# Altium PCB ESC.PcbDoc (part 1 of 2)
Units mil, origin at the board's own origin, x right, y up, seen from the top; angles counter-clockwise.
Board outline 1988.19 x 2913.39 mil, 2 copper layers (Top Layer, Bottom Layer); 78 components, 72 nets, 292 pads, 188 vias.
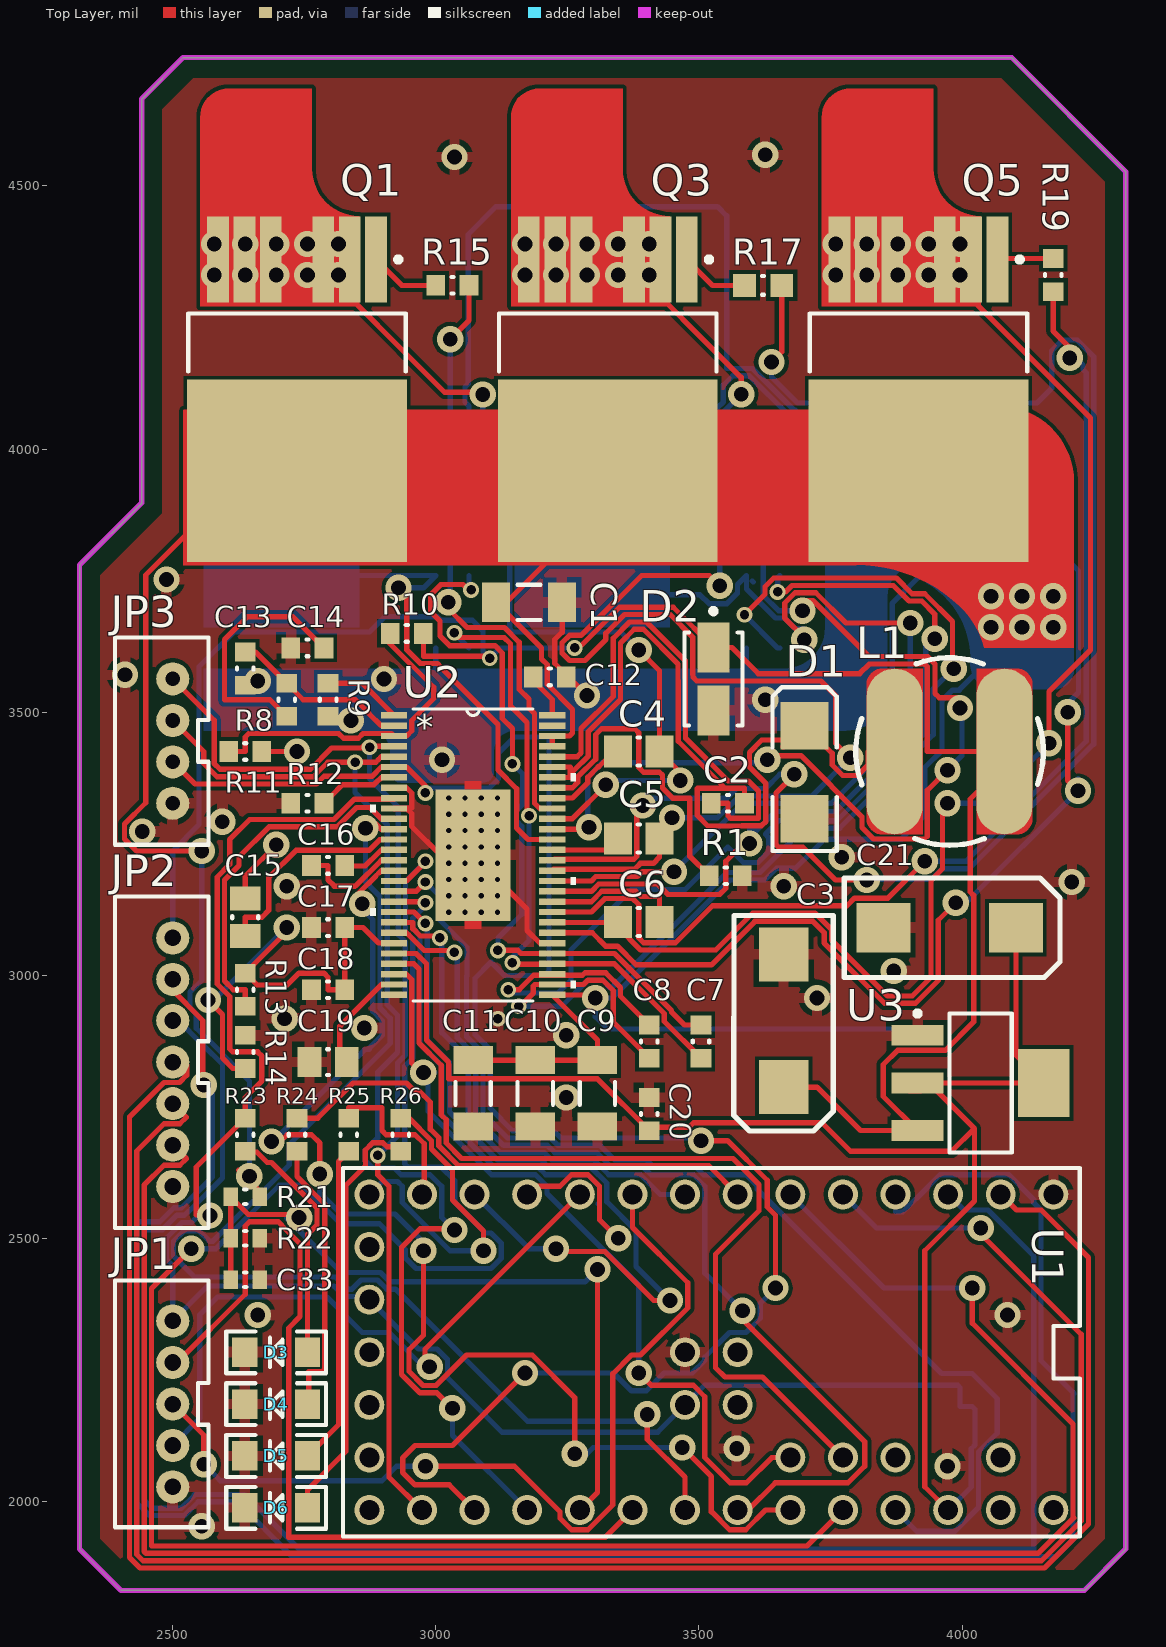
[diagram p0: Top Layer view]
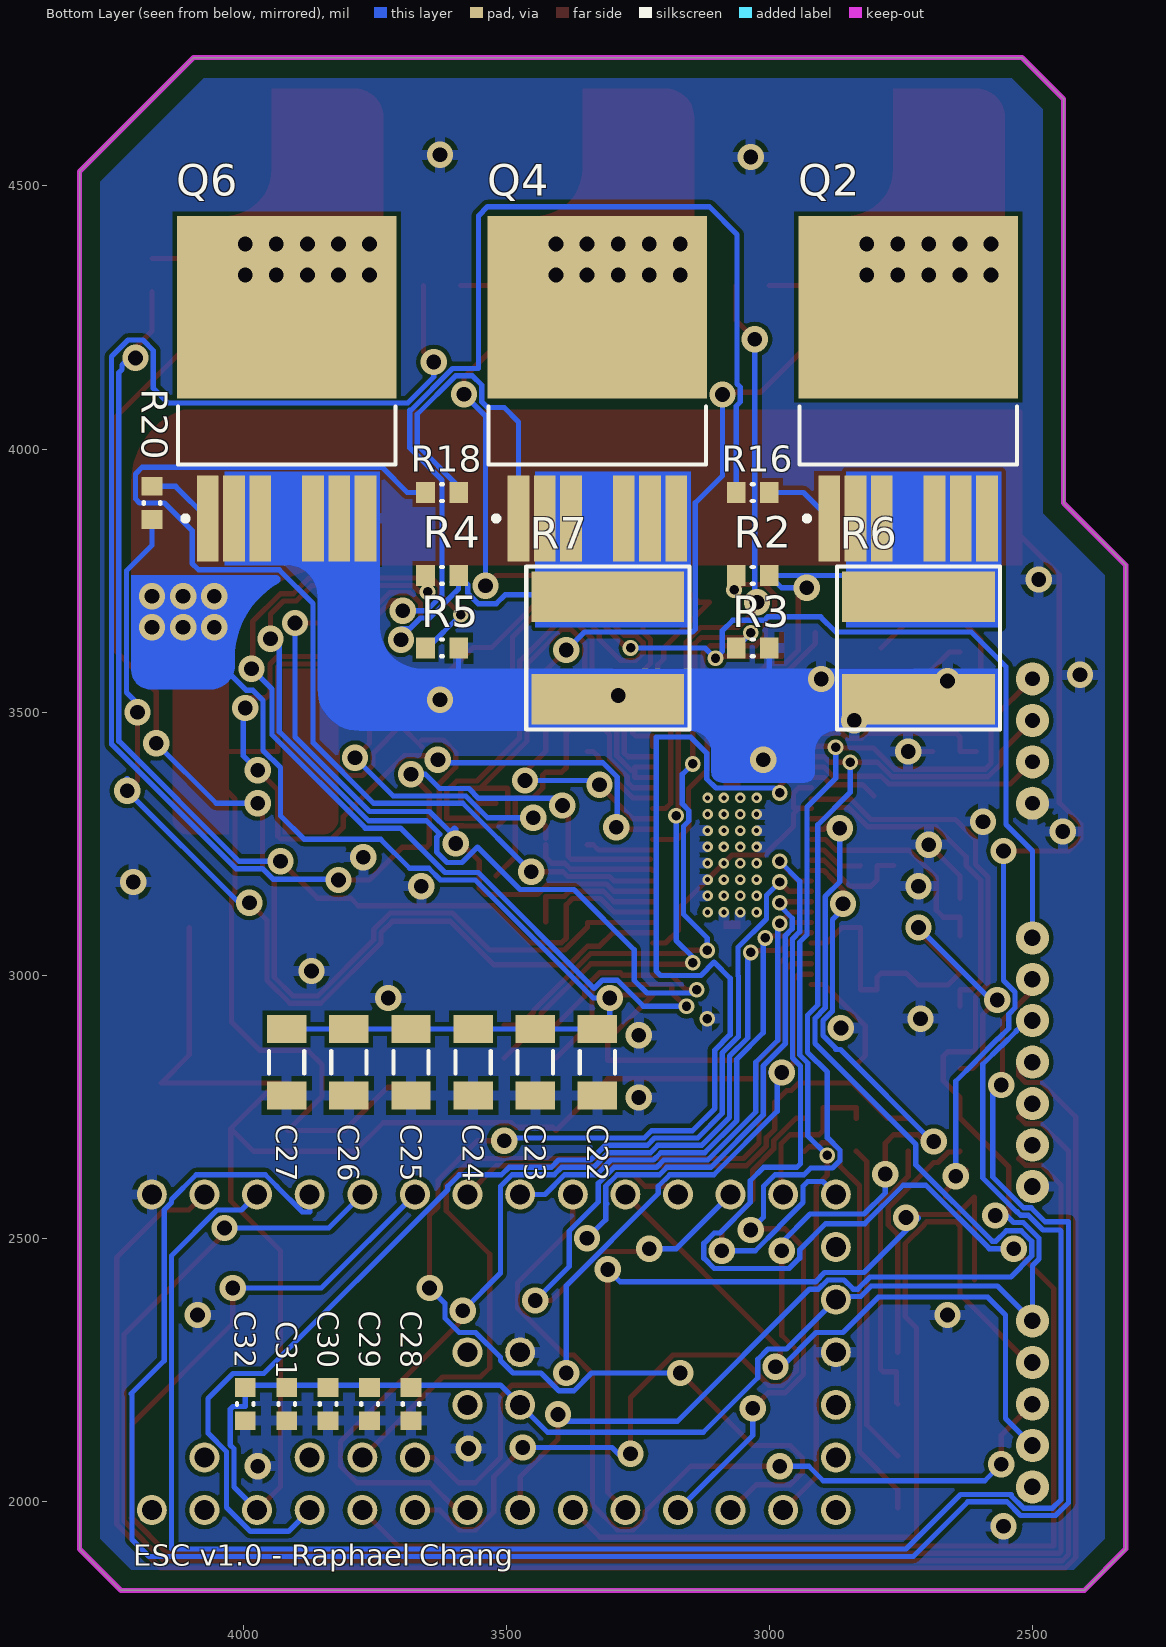
[diagram p1: Bottom Layer view, seen from below]

## Layer stack, top to bottom
Top Solder: solder mask 0.4, Solder Resist, Dk 3.5
Top Layer: signal copper 1.4
Dielectric 1: dielectric 12.6, FR-4, Dk 4.8
Bottom Layer: signal copper 1.4
Bottom Solder: solder mask 0.4, Solder Resist, Dk 3.5

## Board outline
2322.83,1909.45 2401.57,1830.71 4232.28,1830.71 4311.02,1909.45 4311.02,4527.56 4094.49,4744.09 2519.68,4744.09 2440.94,4665.35 2440.94,3897.64 2322.83,3779.53

## Design rules (kind name [scope] priority, off if disabled: settings)
Clearance Clearance_1 [InPolygon] p1: gap=7.87
Clearance [All] p2: gap=3.94
PlaneClearance [All] p1: clearance=40
PolygonConnect [All] p1: connectstyle=Relief reliefconductorwidth=20 reliefentries=4 polygonreliefangle="90 Angle" airgapwidth=10
RoutingVias [All] p1: holewidth=28 width=50 viastyle="Through Hole" minholewidth=18 minwidth=30 maxholewidth=28 maxwidth=50
SolderMaskExpansion [All] p1: expansion=4
Width [All] p1: maxlimit=10 minlimit=10 preferedwidth=10
29 further rules are at their usual default settings.

## Classes and differential pairs
component class U_Power: C1 C2 C3 C4 C5 C6 C7 C8 C9 C10 C11 C12 C13 C14 C15 C16 C17 C18 C19 C20 C21 C22 C23 C24 C25 C26 C27 D1 D2 L1 Q1 Q2 Q3 Q4 Q5 Q6 R1 R2 R3 R4 R5 R6 R7 R8 R9 R10 R11 R12 R13 R14 R15 R16 R17 R18 R19 R20 U2 U3
component class U_MCU: C28 C29 C30 C31 C32 C33 D3 D4 D5 D6 R21 R22 R23 R24 R25 R26 U1
component class ESC: JP1 JP2 JP3

## Components (designator, comment, footprint, x,y, rotation, side; value= is the part's Value field where it differs from the comment)
C1 "10uF" CAPC1206(3216)190_M 3177.17,3708.66 r0 top
C2 "100nF" CAPC0603(1608)100_N 3555.12,3326.77 r0 top
C3 "100uF" AVX-CAPC7343_V 3661.42,2913.39 r90 top
C4 "220nF" CAPC0805(2012)145_M 3385.83,3425.2 r0 top
C5 "220nF" CAPC0805(2012)145_M 3385.83,3259.84 r0 top
C6 "220nF" CAPC0805(2012)145_M 3385.83,3101.22 r180 top
C7 "2.2nF" CAPC0603(1608)100_N 3503.94,2874.02 r270 top
C8 "2.2nF" CAPC0603(1608)100_N 3405.51,2874.02 r270 top
C9 "10uF" CAPC1206(3216)190_M 3307.09,2775.59 r90 top
C10 "10uF" CAPC1206(3216)190_M 3188.98,2775.59 r90 top
C11 "10uF" CAPC1206(3216)190_M 3070.87,2775.59 r90 top
C12 "22nF" CAPC0603(1608)100_N 3216.54,3566.93 r0 top
C13 "120pF" CAPC0603(1608)100_N 2637.8,3582.68 r90 top
C14 "6.8nF" CAPC0603(1608)100_N 2755.91,3622.05 r0 top
C15 "2.2uF" CAPC0805(2012)145_N 2637.8,3110.24 r90 top
C16 "22nF" CAPC0603(1608)100_N 2795.28,3208.66 r0 top
C17 "2.2uF" CAPC0603(1608)55_N 2795.28,3090.55 r0 top
C18 "2.2uF" CAPC0603(1608)55_N 2795.28,2972.44 r0 top
C19 "2.2uF" CAPC0805(2012)145_N 2795.28,2834.65 r0 top
C20 "2.2uF" CAPC0603(1608)55_N 3405.51,2736.22 r90 top
C21 "100uF" AVX-CAPC7343_V 3976.38,3090.55 r180 top
C22 "10uF" CAPC1206(3216)190_M 3326.77,2834.65 r90 bottom
C23 "10uF" CAPC1206(3216)190_M 3444.88,2834.65 r90 bottom
C24 "10uF" CAPC1206(3216)190_M 3562.99,2834.65 r90 bottom
C25 "10uF" CAPC1206(3216)190_M 3681.1,2834.65 r90 bottom
C26 "10uF" CAPC1206(3216)190_M 3799.21,2834.65 r90 bottom
C27 "10uF" CAPC1206(3216)190_M 3917.32,2834.65 r90 bottom
C28 "2.2uF" CAPC0603(1608)55_N 3681.1,2185.04 r90 bottom
C29 "2.2uF" CAPC0603(1608)55_N 3759.84,2185.04 r90 bottom
C30 "2.2uF" CAPC0603(1608)55_N 3838.58,2185.04 r90 bottom
C31 "2.2uF" CAPC0603(1608)55_N 3917.32,2185.04 r90 bottom
C32 "2.2uF" CAPC0603(1608)55_N 3996.06,2185.04 r90 bottom
C33 "100nF" CAPC0603(1608)100_L 2637.8,2421.26 r0 top
D1 "D Schottky" SMB 3700.79,3385.83 r90 top
D2 "TVS 5V" VISH-DO-214AC-2_N 3527.56,3562.99 r270 top
D3 "LED-BLUE" LED-1206 2696.85,2283.46 r180 top
D4 "LED-GREEN" LED-1206 2696.85,2185.04 r180 top
D5 "LED-RED" LED-1206 2696.85,2086.61 r180 top
D6 "LED-AMBER" LED-1206 2696.85,1988.19 r180 top
JP1 "Control Pins" JST-5-PTH-VERT 2500,2185.04 r90 top
JP2 "Encoder Pins" JST-7-PTH-VERT 2500,2834.65 r90 top
JP3 "Test Pins" JST-4-PTH-VERT 2500,3444.88 r90 top
L1 "SDR0805-180ML" SDR0805-180ML 3976.38,3425.2 r0 top
Q1 "IRFS7530" DPAK127P1525X483-7N 2736.22,4114.17 r270 top
Q2 "IRFS7530" DPAK127P1525X483-7N 2736.22,4114.17 r90 bottom
Q3 "IRFS7530" DPAK127P1525X483-7N 3326.77,4114.17 r270 top
Q4 "IRFS7530" DPAK127P1525X483-7N 3326.77,4114.17 r90 bottom
Q5 "IRFS7530" DPAK127P1525X483-7N 3917.32,4114.17 r270 top
Q6 "IRFS7530" DPAK127P1525X483-7N 3917.32,4114.17 r90 bottom
R1 "1M" RESC0603(1608)_N 3551.18,3188.98 r0 top
R2 "100R" RESC0603(1608)_N 3031.5,3759.84 r180 bottom
R3 "100R" RESC0603(1608)_N 3031.5,3622.05 r180 bottom
R4 "100R" RESC0603(1608)_N 3622.05,3759.84 r180 bottom
R5 "100R" RESC0603(1608)_N 3622.05,3622.05 r180 bottom
R6 "0.001R" Shunt 2716.54,3622.05 r90 bottom
R7 "0.001R" Shunt 3307.09,3622.05 r90 bottom
R8 "15K" RESC0603(1608)_N 2716.54,3523.62 r90 top
R9 "220K" RESC0603(1608)_N 2795.28,3523.62 r90 top
R10 "18K" RESC0603(1608)_N 2944.88,3649.61 r180 top
R11 "3K3" RESC0603(1608)_N 2637.8,3425.2 r0 top
R12 "10K" RESC0603(1608)_N 2755.91,3326.77 r0 top
R13 "330K" RESC0603(1608)_N 2637.8,2972.44 r90 top
R14 "10K" RESC0603(1608)_N 2637.8,2854.33 r90 top
R15 "4R7" RESC0603(1608)_N 3031.5,4311.02 r0 top
R16 "4R7" RESC0603(1608)_N 3031.5,3917.32 r0 bottom
R17 "4R7" RESC0603(1608)_M 3622.05,4311.02 r0 top
R18 "4R7" RESC0603(1608)_N 3622.05,3917.32 r0 bottom
R19 "4R7" RESC0603(1608)_N 4173.23,4330.71 r270 top
R20 "4R7" RESC0603(1608)_N 4173.23,3897.64 r270 bottom
R21 "200K" RESC0603(1608)_L 2637.8,2578.74 r0 top
R22 "10K" RESC0603(1608)_L 2637.8,2500 r0 top
R23 "10R" RESC0603(1608)_N 2637.8,2696.85 r90 top
R24 "15R" RESC0603(1608)_N 2736.22,2696.85 r90 top
R25 "180R" RESC0603(1608)_N 2834.65,2696.85 r90 top
R26 "150R" RESC0603(1608)_N 2933.07,2696.85 r90 top
U1 "Teensy 3.0" TEENSY_3.0_ALLANALOG 3523.62,2283.46 r270 top
U2 "DRV8302" DCA56_6P35X3P61 3070.87,3228.35 r0 top
U3 "TC2117" SOT-223-DB3_M 4035.43,2795.28 r0 top

## Footprints (in the part's own frame and the unit in brackets; to place one, negate y for a bottom-side part, rotate by r counter-clockwise, add the part's x,y. Pads: shape width x height; smd on the part's side, far side on the other; paste and mask are expansions set on the pad)
AVX-CAPC7343_V [mm] "SMT Capacitor, 2 Leads, Body 7.3x4.3mm"
  rect 2.6x2.4 smd: 1(-3.202,0.007) 2(3.198,0.007)
  silkscreen extent -5.33,-2.39 5.08,2.41, body extent -3.49,-2.03 3.51,2.04, height 4.05
CAPC0603(1608)55_N [mm] "Chip Capacitor, Body 1.6x0.8mm, Height 0.55mm, IPC Medium Density"
  rect 0.9x1 smd: 1(-0.8,0) 2(0.8,0)
  silkscreen extent -0.05,-0.4 0.05,0.4, body extent -0.87,-0.48 0.88,0.47, height 0.55
CAPC0603(1608)100_L [mm] "Chip Capacitor, Body 1.6x0.8mm, Height 1.0mm, IPC High Density"
  rect 0.7x0.9 smd: 1(-0.7,0) 2(0.7,0)
  silkscreen extent -0.05,-0.35 0.05,0.35, body extent -0.87,-0.47 0.88,0.48, height 1
CAPC0603(1608)100_N [mm] "Chip Capacitor, Body 1.6x0.8mm, Height 1.0mm, IPC Medium Density"
  rect 0.9x1 smd: 1(-0.8,0) 2(0.8,0)
  silkscreen extent -0.05,-0.4 0.05,0.4, body extent -0.87,-0.48 0.88,0.47, height 1
CAPC0805(2012)145_M [mm] "Chip Capacitor, Body 2.0x1.2mm, Height 1.45mm, IPC Low Density"
  rect 1.35x1.55 smd: 1(-1,0) 2(1,0)
  silkscreen extent -0.05,-0.68 0.05,0.68, body extent -1.1,-0.72 1.1,0.72, height 1.45
CAPC0805(2012)145_N [mm] "Chip Capacitor, Body 2.0x1.2mm, Height 1.45mm, IPC Medium Density"
  rect 1.15x1.45 smd: 1(-0.9,0) 2(0.9,0)
  silkscreen extent -0.05,-0.62 0.05,0.63, body extent -1.1,-0.72 1.1,0.73, height 1.45
CAPC1206(3216)190_M [mm] "Chip Capacitor, Body 3.2x1.6mm, Height 1.9mm, IPC Low Density"
  rect 1.35x1.9 smd: 1(-1.6,0) 2(1.6,0)
  silkscreen extent -0.55,-0.85 0.55,0.85, body extent -1.7,-0.9 1.7,0.9, height 1.9
DCA56_6P35X3P61 [mil]
  rect 50x12 smd mask+2: 1(-150.5,265.75) 2(-150.5,246.06) 3(-150.5,226.38) 4(-150.5,206.69) 5(-150.5,187.01) 6(-150.5,167.32) 7(-150.5,147.64) 8(-150.5,127.95) 9(-150.5,108.27) 10(-150.5,88.58) 11(-150.5,68.9) 12(-150.5,49.21) 13(-150.5,29.53) 14(-150.5,9.84) 15(-150.5,-9.84) 16(-150.5,-29.53) 17(-150.5,-49.21) 18(-150.5,-68.9) 19(-150.5,-88.58) 20(-150.5,-108.27) 21(-150.5,-127.95) 22(-150.5,-147.64) 23(-150.5,-167.32) 24(-150.5,-187.01) 25(-150.5,-206.69) 26(-150.5,-226.38) 27(-150.5,-246.06) 28(-150.5,-265.75) 29(150.5,-265.75) 30(150.5,-246.06) 31(150.5,-226.38) 32(150.5,-206.69) 33(150.5,-187.01) 34(150.5,-167.32) 35(150.5,-147.64) 36(150.5,-127.95) 37(150.5,-108.27) 38(150.5,-88.58) 39(150.5,-68.9) 40(150.5,-49.21) 41(150.5,-29.53) 42(150.5,-9.84) 43(150.5,9.84) 44(150.5,29.53) 45(150.5,49.21) 46(150.5,68.9) 47(150.5,88.58) 48(150.5,108.27) 49(150.5,127.95) 50(150.5,147.64) 51(150.5,167.32) 52(150.5,187.01) 53(150.5,206.69) 54(150.5,226.38) 55(150.5,246.06) 56(150.5,265.75)
  rect 142.13x250 smd mask-124.5: 57(0,0)
  Top Layer region: 15.75,125 -15.75,125 -15.75,125 -15.75,125 -15.75,139.96 15.75,139.96 15.75,125 15.75,125
  Top Layer region: 15.75,-125 -15.75,-125 -15.75,-125 -15.75,-125 -15.75,-139.96 15.75,-139.96 15.75,-125 15.75,-125
  silkscreen extent -196,-278 196,278
DPAK127P1525X483-7N [mm] "D2-PAK, 7-Pads, Body 7.93x8.63mm (max), IPC Medium Density"
  rect 4.15x1.05 smd mask+0.051: 1(-6.25,3.81) 2(-6.25,2.54) 2(-6.25,-1.27) 2(-6.25,1.27) 2(-6.25,-3.81) 2(-6.25,-2.54)
  rect 8.8x10.6 smd: 8(3.95,0)
  silkscreen extent -6.37,-5.25 -0.85,5.25, body extent -3.65,-5.28 6,5.28, height 4.83
JST-4-PTH-VERT [mil]
  round 63 hole 28: 1(-118.11,0) 2(-39.37,0) 3(39.37,0) 4(118.37,0)
  silkscreen extent -197,-68 197,110
JST-5-PTH-VERT [mil]
  round 63 hole 31.5: 1(-157.48,0) 2(-78.74,0) 3(0,0) 4(79,0) 5(158,0)
  silkscreen extent -234,-68 235,110
JST-7-PTH-VERT [mil]
  round 63 hole 31.5: 1(-236.22,0) 2(-157.48,0) 3(-78.74,0) 4(0.26,0) 5(79.26,0) 6(157.48,0) 7(236.22,0)
  silkscreen extent -315,-68 315,110
LED-1206 [mil]
  rect 48x56 smd: A(-59.06,0) C(60,0)
  silkscreen extent -94,-39 95,40
RESC0603(1608)_L [mm] "Chip Resistor, Body 1.6x0.8mm, IPC High Density"
  rect 0.7x0.9 smd: 1(-0.7,0) 2(0.7,0)
  silkscreen extent -0.05,-0.35 0.05,0.35, body extent -0.85,-0.47 0.85,0.47, height 0.6
RESC0603(1608)_M [mm] "Chip Resistor, Body 1.6x0.8mm, IPC Low Density"
  rect 1.1x1.1 smd: 1(-0.9,0) 2(0.9,0)
  silkscreen extent -0.05,-0.45 0.05,0.45, body extent -0.85,-0.47 0.85,0.47, height 0.6
RESC0603(1608)_N [mm] "Chip Resistor, Body 1.6x0.8mm, IPC Medium Density"
  rect 0.9x1 smd: 1(-0.8,0) 2(0.8,0)
  silkscreen extent -0.05,-0.4 0.05,0.4, body extent -0.85,-0.47 0.85,0.47, height 0.6
SDR0805-180ML [mm]
  rrect100% 2.7x8 smd: 1(-2.65,0) 2(2.65,0)
  Top Layer region: 3.25,4 1.3,4 1.3,-4 3.25,-4 3.537,-3.943 3.78,-3.78 3.943,-3.537 4,-3.25 4,-3.25 4,3.25 3.943,3.537 3.78,3.78 3.537,3.943 3.25,4
  Top Layer region: -3.25,4 -1.3,4 -1.3,-4 -3.25,-4 -3.537,-3.943 -3.78,-3.78 -3.943,-3.537 -4,-3.25 -4,-3.25 -4,3.25 -3.943,3.537 -3.78,3.78 -3.537,3.943 -3.25,4
  silkscreen extent -4.52,-4.53 4.52,4.52
Shunt [mm]
  rect 2.44x7.38 smd: 1(-2.48,0) 2(2.48,0)
  silkscreen extent -3.94,-3.94 3.94,3.94
SMB [mm] "DO-214-AA/SMB; 2 C-Bend Leads; Body 5.3 x 3.6 mm, inc. leads (LxW)"
  rect 2.3x2.3 smd: 1(-2.25,0) 2(2.25,0)
  silkscreen extent -3.8,-1.55 4.1,1.55
SOT-223-DB3_M [mm] "SOT223, 4-Leads, Body 6.5x3.5mm, Pitch 2.3mm, Lead Span 7mm, IPC Low Density"
  rect 2.5x1 smd: 1(-3.05,2.3) 2(-3.05,0) 3(-3.05,-2.3)
  rect 2.5x3.3 smd: 2(3.05,0)
  silkscreen extent -3.17,-3.35 1.5,3.47, body extent -1.85,-3.35 1.85,3.35, height 1.8
TEENSY_3.0_ALLANALOG [mil]
  round 57 hole 38: 0(-300,550) 1(-300,450) 2(-300,350) 3(-300,250) 3.3V(-100,-650) 3.3V(100,-50) 3.3V(300,450) 4(-300,150) 5(-300,50) 6(-300,-50) 7(-300,-150) 8(-300,-250) 9(-300,-350) 10(-300,-450) 11(-300,-550) 12(-300,-650) 13(300,-650) 14/A0(300,-550) 15/A1(300,-450) 16/A2(300,-350) 17/A3(300,-250) 18/A4(300,-150) 19/A5(300,-50) 20/A6(300,50) 21/A7(300,150) 22/A8(300,250) 23/A9(300,350) A10(200,250) A11(200,150) A12(0,50) A13(100,50) AGND(300,550) AREF(200,350) GND(-300,650) GND(0,-50) GND(0,-650) PGM(100,-650) RST(200,-650) VBAT(-200,-650) VIN(300,650) VUSB(200,550)
  silkscreen extent -350,-700 350,700
VISH-DO-214AC-2_N [mm] "DO-214AC, 2-Leads, Body 4.5x2.79mm, IPC Medium Density"
  rect 2.4x1.55 smd: 1(-1.525,0) 2(1.525,0)
  silkscreen extent -3.4,-1.4 2.25,1.4, body extent -2.25,-1.4 2.25,1.39, height 2.29

## Part data
C1 C9 C10 C11 C22 C23 C24 C25 C26 C27: library part CMP-1037-04982-1, "CAP 10uF 50V ±10% 1206 (3216 Metric) Thickness 1.9mm SMD"
C2 C33: library part CMP-1035-02591-1, "CAP 100nF 50V ±5% 0603 (1608 Metric) Thickness 1mm SMD"
C3 C21: library part CMP-0279-00002-1, "Capacitor, Tantalum, 220uF 10% 10V MCCT-D (7343-31)"
C4 C5 C6: library part CMP-1036-04540-1, "CAP 220nF 25V ±5% 0805 (2012 Metric) Thickness 1.45mm SMD"
C7 C8: library part CMP-1035-02036-1, "CAP 2.2nF 50V ±1% 0603 (1608 Metric) Thickness 1mm SMD"
C12 C16: library part CMP-1035-02425-1, "CAP 22nF 50V ±5% 0603 (1608 Metric) Thickness 1mm SMD"
C13: library part CMP-1035-01317-1, "CAP 120pF 50V ±1% 0603 (1608 Metric) Thickness 1mm SMD"
C14: library part CMP-1035-02266-1, "CAP 6.8nF 50V ±1% 0603 (1608 Metric) Thickness 1mm SMD"
C15 C19: library part CMP-1036-04830-1, "CAP 2.2uF 16V ±5% 0805 (2012 Metric) Thickness 1.45mm SMD"
C17 C18 C20 C28 C29 C30 C31 C32: library part CMP-1035-02762-1, "CAP 2.2uF 16V ±10% 0603 (1608 Metric) Thickness 0.55mm SMD"
D1: "Schottky Diode"
D2: library part CMP-0548-00235-1, "Transient Voltage Suppressor, 6.40 to 231 V, 5 V Stand-off Voltage, Uni-Directional, -55 to 155 degC, 2-pin DO-214AC, Pb-Free, Tape and Reel"
D3: library part LED-BLUE1206
D4: library part LED-GREEN1206
D5: library part LED-RED1206
D6: library part LED-AMBER1206
JP1: library part JST_5_VERT
JP2: library part JST_7_VERT
JP3: library part JST_4_VERT
L1: "Inductor"
Q1 Q2 Q3 Q4 Q5 Q6: "N-Channel MOSFET"
R1: library part CMP-1012-00146-1, "1M 0.1W 5% 0603 (1608 Metric)  SMD"
R2 R3 R4 R5: library part CMP-1012-00050-1, "100R 0.1W 5% 0603 (1608 Metric)  SMD"
R6 R7: library part Shunt, "Resistor"
R8: library part CMP-1012-00102-1, "15K 0.1W 5% 0603 (1608 Metric)  SMD"
R9: library part CMP-1012-00130-1, "220K 0.1W 5% 0603 (1608 Metric)  SMD"
R10: library part CMP-1012-00104-1, "18K 0.1W 5% 0603 (1608 Metric)  SMD"
R11: library part CMP-1012-00086-1, "3K3 0.1W 5% 0603 (1608 Metric)  SMD"
R12 R14 R22: library part CMP-1012-00098-1, "10K 0.1W 5% 0603 (1608 Metric)  SMD"
R13: library part CMP-1012-00134-1, "330K 0.1W 5% 0603 (1608 Metric)  SMD"
R15 R16 R17 R18 R19 R20: library part CMP-1012-00018-1, "4R7 0.1W 5% 0603 (1608 Metric)  SMD"
R21: library part CMP-1012-00129-1, "200K 0.1W 5% 0603 (1608 Metric)  SMD"
R23: library part CMP-1012-00026-1, "10R 0.1W 5% 0603 (1608 Metric)  SMD"
R24: library part CMP-1012-00030-1, "15R 0.1W 5% 0603 (1608 Metric)  SMD"
R25: library part CMP-1012-00056-1, "180R 0.1W 5% 0603 (1608 Metric)  SMD"
R26: library part CMP-1012-00054-1, "150R 0.1W 5% 0603 (1608 Metric)  SMD"
U1: library part TEENSY_3.0_ALLANALOGPINS
U2: library part DRV8302_DCA_56, "Imported"
U3: library part PM-LINEREG-TC2117-IL4

## Via types
v1: diameter 50, hole 28, Top Layer to Bottom Layer, 133 vias
v2: diameter 20, hole 10, Top Layer to Bottom Layer, 32 vias
v3: diameter 30, hole 18, Top Layer to Bottom Layer, 23 vias

## Nets (pads, with @x,y where several pads share a name; then routed paths per layer and width w, separated by ;. In a path a pad name is that pad's centre, name@x,y a point inside that pad or via, vN(x,y) a via of type N, cw(c..) or ccw(c..) an arc to the next point about the centre after c; other vN are vias at no path point)
5V: C3.1 D2.1 JP2.7 L1.2 R10.1 U3.3 | length 3785.9
  Top Layer w10: R10.1@2976.38,3649.61 2976.38,3630.08 2976.38,3606.3 3094.49,3606.3 3098.43,3602.36 v3(3102.36,3602.36) ; v3(3263.77,3622.04) 3271.66,3622.04 3348.91,3699.29 3451.3,3699.29 D2.1@3527.56,3623.03 3562.99,3623.03 3612.85,3573.18 3805.46,3573.18 3823.9,3591.61 3928.9,3591.61 3934.13,3586.38 3934.13,3425.2 L1.2@4080.71,3425.2 4080.71,3399.61 4015.75,3334.65 4015.75,3158.23 4022.13,3151.85 4022.13,2911.06 3968.27,2857.2 3877.18,2857.2 3850.39,2830.42 3850.39,2769.68 U3.3@3915.35,2704.72 3807.09,2704.72 3724.49,2787.32 C3.1@3661.14,2787.32
  Bottom Layer w10: JP2.7@2500,3070.87 2500,3236.22 2550.12,3286.34 2550.12,3586.38 2616.22,3652.48 2873.84,3652.48 2902.46,3681.1 3003.17,3681.1 3009.56,3674.72 3069.38,3674.72 3089.65,3654.45 3089.65,3615.07 v3(3102.36,3602.36) 3122.04,3622.04 v3(3263.77,3622.04)
CLK: JP2.5 U1.1 | length 3567.2
  Bottom Layer w10: JP2.5@2500,2913.91 2511.29,2913.91 2530.86,2894.34 2530.86,2893.55 2558.91,2865.51 2559.69,2865.51 2594.49,2830.71 2594.49,2614.92 2530.11,2550.55 2529.02,2550.55 2522.52,2544.05 2508.17,2544.05 2479.87,2515.75 2447.75,2515.75 2445.63,2513.62 2445.63,2003.19 2461.7,1987.12 2516.75,1987.12 2540.44,2010.81 2540.44,2013.2 2636.4,2013.2 2740.16,1909.45 4136.19,1909.45 4136.19,2466.93 4049.49,2553.62 4003.46,2553.62 U1.1@3973.62,2583.46
CS: JP2.6 U1.2 | length 4021.6
  Top Layer w10: JP2.6@2500,2992.13 2513.4,2978.72 2509.37,2974.69 2496.41,2974.69 2556.92,2914.17 2556.92,2793.46 v1(2559.05,2791.33)
  Bottom Layer w10: v1(2559.05,2791.33) 2575.35,2775.03 2575.35,2616.59 2516.75,2557.99 2502.4,2557.99 2475.91,2531.5 2431.69,2531.5 2431.69,1997.42 2455.92,1973.19 2522.52,1973.19 2548.6,1999.26 2622.78,1999.26 2726.54,1895.51 4179,1895.51 4211.06,1927.57 4211.06,2203.18 4212.6,2204.72 4150.12,2267.2 4150.12,2554.02 4136.19,2567.96 4136.19,2573.84 4089.13,2620.9 3958.12,2620.9 3936.18,2598.97 3936.18,2598.65 3887.5,2549.96 3873.62,2549.96 U1.2@3873.62,2583.46
DIO: JP2.4 U1.0 | length 3615.9
  Top Layer w10: JP2.4@2500,2834.91 2520.47,2834.91 2526.5,2828.87 2526.5,2809.79 2513.06,2796.34 2483.25,2796.34 2417.75,2730.84 2417.75,1893.22 2437.59,1873.39 4156.9,1873.39 4240.47,1956.96 4240.47,2463.67 4150.52,2553.62 4103.46,2553.62 U1.0@4073.62,2583.46
FAULT: JP3.2 U1.15/A1 U2.6 | length 3598.5
  Top Layer w10: JP3.2@2500,3405.51 2542.13,3363.39 2772.88,3363.39 2787.71,3378.21 2826.54,3378.21 2826.8,3377.95 2878.67,3377.95 2896.39,3395.67 2944.32,3395.67 2980.32,3359.67 v3(2980.31,3346.45) ; U1.15/A1@3073.62,1983.46 3025.59,2031.5 2960.63,2031.5 2937.01,2055.12 2937.01,2082.68 2960.63,2106.3 3031.5,2106.3 v1(3169.29,2244.09) ; v1(3503.94,2685.67) 3554.49,2685.67 3629.92,2610.24 3629.92,2559.68 3645.67,2543.94 v1(3645.67,2405.51)
  Bottom Layer w10: v3(2980.31,3346.45) 2980.31,3345.51 2990.58,3355.78 3101.53,3355.78 3119.17,3373.43 3119.17,3422.32 3149.61,3452.76 3215.2,3452.76 3215.2,3007.87 3207,2999.68 3130.24,2999.68 3105.1,3024.82 3074.49,2994.22 3074.49,2887.02 3103.62,2857.88 3103.62,2746.77 3145.87,2704.52 3223.77,2704.52 3237.7,2690.59 3499.02,2690.59 v1(3503.94,2685.67) ; v1(3169.29,2244.09) 3337.83,2244.09 3371.77,2210.16 3399.88,2210.16 3433.82,2244.09 3487.2,2244.09 3511.06,2267.96 3511.06,2273.84 3558.12,2320.9 3589.37,2320.9 3616.61,2348.14 3616.61,2376.45 v1(3645.67,2405.51)
GH_A: R15.2 U2.47 | length 1148.9
  Top Layer w10: v1(3023.62,3708.65) 3023.62,3696.47 3059.39,3660.7 3130.62,3660.7 3158.38,3632.93 3158.38,3543.54 3177.17,3524.76 3177.17,3507.87 3187.43,3497.61 3187.43,3464.71 3187.56,3464.58 ; v1(3027.56,4208.66) 3062.99,4244.09 R15.2@3062.99,4311.02 ; 3187.56,3444.87 3187.43,3444.74 3187.43,3425.34 3187.57,3425.2 3187.43,3425.06 3187.43,3405.65 3187.57,3405.51 3187.43,3405.37 3187.43,3385.97 3187.57,3385.83 3187.43,3385.69 3187.43,3366.28 3187.57,3366.14 3187.43,3366 3187.43,3346.6 3187.57,3346.46 3187.43,3346.32 3187.43,3326.91 3197.41,3316.93 U2.47@3221.37,3316.93 ; 3187.56,3444.89 3187.43,3445.02 3187.43,3464.43 3187.56,3464.55
  Bottom Layer w10: v1(3023.62,3708.65) 3027.56,3712.6 v1(3027.56,4208.66)
GH_B: R17.2 U2.42 | length 3132.1
  Top Layer w10: U2.42@3226.11,3220.39 3376.73,3220.39 3381.97,3225.63 3381.97,3311.1 3393.69,3322.82 v1(3393.33,3322.46) ; v1@3625.98,4153.54 3657.48,4185.04 R17.2@3657.48,4311.02 ; v1(3681.1,3381.89) 3681.1,3380.75 3646.58,3346.22 3646.58,3248.27 3651.81,3243.03 3697.91,3243.03 3759.85,3181.1 v1(3818.89,3181.1)
  Bottom Layer w10: v1(3393.33,3322.46) 3407.01,3336.14 3552.63,3336.14 3571.13,3354.65 3626.3,3354.65 3653.54,3381.89 v1(3681.1,3381.89) ; v1(3637.79,4165.35) 3637.79,4137.06 3687.33,4087.52 4142.64,4087.52 4170.79,4115.67 4170.79,4187.29 4190.67,4207.17 4218.78,4207.17 4250.16,4175.79 4250.16,3439.11 4013.65,3202.6 3963.19,3202.6 3943.19,3182.6 3820.39,3182.6 v1(3818.89,3181.1)
GH_C: R19.2 U2.37 | length 2163.1
  Top Layer w10: U2.37@3221.37,3120.08 3295.59,3120.08 3321.18,3145.67 3374.02,3145.67 3385.83,3133.86 3385.83,3070.87 3394.92,3061.77 3455.47,3061.77 3525.75,3132.05 3781.18,3132.05 3795.59,3146.46 3859.06,3146.46 v1(3929.13,3216.54) ; R19.2@4173.23,4299.21 4173.23,4224.41 4220.47,4177.17 4216.54,4173.23 v1(4204.72,4173.23)
  Bottom Layer w10: v1(3929.13,3216.54) 4007.87,3216.54 4236.22,3444.88 4236.22,4145.21 4230.16,4151.27 4230.16,4159.61 4216.54,4173.23 v1(4204.72,4173.23)
GL_A: R16.2 U2.45 | length 3589.3
  Top Layer w10: U2.45@3221.37,3277.56 3293.54,3277.56 3297.12,3281.14 v1(3290.94,3281.14) ; v1(3629.91,3409.44) 3629.91,3424.03 3636.63,3417.32 3693.66,3417.32 3809.96,3301.03 3809.96,3280.95 3832.13,3258.78 3928.9,3258.78 ; v1(3696.85,3692.91) 3696.85,3704.71 3704.42,3712.28 3716.83,3712.28 3823.56,3605.55 3934.67,3605.55 3948.82,3591.4 3948.82,3535.43 3956.7,3527.55 3996.05,3527.55 v1(3996.05,3507.87) ; 3934.13,3264.01 3934.13,3351.46 v1(3972.43,3389.76)
  Bottom Layer w10: R16.2@3062.99,3917.32 3062.99,4081.93 3055.24,4089.68 3055.24,4117.8 3061.33,4123.89 3061.5,4124.06 3061.5,4407.95 3114.17,4460.63 3535.43,4460.63 3552.82,4443.24 3552.82,4153.08 3602.06,4153.08 3681.56,4073.58 3683.23,4073.58 3683.23,4002.13 3622.05,3940.94 3622.05,3722.05 3651.19,3692.91 v1(3696.85,3692.91) ; v1@3300.11,3281.14 v1(3290.94,3281.14) 3288.89,3283.19 3288.89,3376.26 3316.65,3404.02 3624.49,3404.02 v1(3629.91,3409.44) ; v1(3972.43,3389.76) 3999.99,3417.32 3999.99,3507.87 v1(3996.05,3507.87)
GL_B: R18.2 U2.40 | length 2099.2
  Top Layer w10: U2.40@3221.37,3179.13 3295.51,3179.13 3303.86,3187.48 3383.24,3187.48 3392.6,3196.84 v1(3452.75,3196.84)
  Bottom Layer w10: v1(3452.75,3196.84) 3582.68,3326.77 3751.97,3326.77 3867.2,3442.01 3867.2,3706.2 3931.6,3770.59 4084.8,3770.59 4096.93,3782.72 4096.93,3844.96 4149.61,3897.64 4196.85,3897.64 4204.72,3905.51 4204.72,3952.76 4191.85,3965.63 3736.46,3965.63 3688.15,3917.32 R18.2@3653.54,3917.32
GL_C: R20.2 U2.35 | length 2001.4
  Top Layer w10: U2.35@3221.37,3080.71 3297.24,3080.71 3322.67,3055.28 3345.21,3055.28 3380.8,3019.68 3523.62,3019.68 3606.3,3102.36 3716.54,3102.36 3738.03,3080.87 3738.03,3061.16 3852.49,2946.69 3911.28,2946.69 3954.88,2990.29 3954.88,3104.49 v1(3988.19,3137.8) ; v1(4200.79,3500) 4200.79,3370.08 v1(4220.47,3350.39)
  Bottom Layer w10: v1(3988.19,3137.8) 4007.87,3137.8 v1(4220.47,3350.39) ; R20.2@4173.23,3866.14 4173.23,3817.09 4221.54,3768.78 4221.54,3576.39 4221.54,3537.1 4184.44,3500 v1(4200.79,3500) ; v1(4220.47,3350.39) 4220.47,3374.02 4232.28,3362.2 v1(4220.47,3350.39)
GND: C1.2 C3.2 C9.1 C10.1 C11.1 C12.2 C13.1 C14.1 C15.2 C17.1 C18.1 C19.1 C20.2 C21.2 C22.1 C23.1 C24.1 C25.1 C26.1 C27.1 C28.1 C29.1 C30.1 C31.1 C32.1 C33.2 D1.1 D2.2 D3.C D4.C D5.C D6.C JP1.1 JP2.1 JP3.1 Q6.2 R1.2 R3.2 R5.2 R6.1 R7.1 R9.1 R11.2 R12.1 R14.2 R22.2 U1.GND U2.8 U2.10 U2.28 U2.34 U2.57 U3.1 | length 1507.6
  Top Layer w10: v1(2594.1,3291.73) v1@2602.75,3291.73 ; C15.2@2637.8,3145.67 2637.8,3188.98 v1(2696.85,3248.03) ; C13.1@2637.8,3551.18 2653.54,3551.18 v1(2661.42,3559.06) ; 2688.98,3425.2 v1(2736.22,3425.2) ; v1(2716.53,3169.28) v1@2731.41,3169.28 ; R9.1@2795.28,3492.13 2803.15,3484.25 v1(2838.58,3484.25) ; U2.8@2920.37,3356.3 2944.32,3356.3 2954.3,3346.32 2954.3,3317.93 2920.37,3317.93 U2.10@2920.37,3316.93 2944.32,3316.93 2954.3,3306.95 2954.3,3282.99 3008.95,3228.35 U2.57@3070.87,3228.35 3173.23,3125.98 3173.23,3085.21 3197.41,3061.02 U2.34@3221.37,3061.02 ; C1.2@3240.16,3708.66 3240.16,3651.99 3225.9,3637.73 3225.9,3593 v1(3287.4,3531.5)
  Bottom Layer w10: R6.1@2729.14,3511.81 3000,3511.81 R3.2@3000,3622.05 ; 3583.47,3524.41 3590.55,3531.5 R5.2@3590.55,3622.05
  other v1: 2555.12,1952.76 3972.44,2066.93 3571.79,2100.46 2661.42,2354.33 4086.61,2354.33 3248.03,2767.72 3248.03,2885.83 2864.02,2899.76 2712.6,2917.32 3724.41,2956.69 3870.08,3007.87 3661.42,3169.29 4208.66,3177.17 3771.65,3224.41 2442.18,3273.23 3011.81,3409.45 3625.98,3523.62 2901.57,3562.99 2409.45,3570.87 2488.19,3751.97 3035.43,4555.12 3625.98,4559.06
  other v2: 3024.37,3119.85 3055.37,3119.85 3086.37,3119.85 3117.37,3119.85 3024.37,3150.85 3055.37,3150.85 3086.37,3150.85 3117.37,3150.85 3024.37,3181.85 3055.37,3181.85 3086.37,3181.85 3117.37,3181.85 3024.37,3212.85 3055.37,3212.85 3086.37,3212.85 3117.37,3212.85 3024.37,3243.85 3055.37,3243.85 3086.37,3243.85 3117.37,3243.85 3024.37,3274.85 3055.37,3274.85 3086.37,3274.85 3117.37,3274.85 3024.37,3305.85 3055.37,3305.85 3086.37,3305.85 3117.37,3305.85 3024.37,3336.85 3055.37,3336.85 3086.37,3336.85 3117.37,3336.85
  other v3: 3118.11,2917.32
NetC2_1: C2.1 U2.52 | length 979.9
  Top Layer w10: U2.52@3221.37,3415.35 3268.86,3415.35 3275.95,3422.44 3275.95,3468.91 3337.09,3530.05 3337.09,3640.24 3368.27,3671.42 3400.22,3671.42 3474.17,3597.47 3474.17,3566.31 3474.65,3565.84 3474.65,3450.55 3555.87,3369.33 3594.1,3369.33 3613.27,3350.16 3613.27,3298.15 3560.12,3298.15 3555.12,3303.15 3555.12,3326.77 C2.1@3519.68,3326.77
NetC2_2: C2.2 D1.2 L1.1 U2.50 U2.51 | length 1639.5
  Top Layer w10: U2.50@3221.37,3375.98 3255.59,3375.98 3255.59,3389.45 ; U2.51@3221.37,3395.67 3255.59,3395.67 3255.59,3389.45 ; C2.2@3586.61,3326.77 3586.61,3355.39 3550.09,3355.39 ; D1.2@3660.51,3434.13 D1.2@3700.79,3474.41 3753.46,3421.73 3753.46,3399.33 3773.34,3379.45 3801.46,3379.45 3821.34,3399.33 3821.34,3425.2 L1.1@3872.05,3425.2 ; D1.2@3660.51,3447 3619.48,3447 3595.98,3423.5 3595.98,3395.38 3627.2,3364.16 3627.2,3292.38 3619.04,3284.21 3582.11,3284.21 3581.36,3283.46 3516.89,3283.46 3496.97,3303.38 3496.97,3354.49 3497.88,3355.39 3550.09,3355.39 ; 3255.59,3389.45 3262.67,3389.45 3289.89,3416.67 3289.89,3463.14 3351.02,3524.28 3351.02,3631.3 3377.2,3657.48 3394.45,3657.48 3460.24,3591.69 3460.24,3560.54 3460.71,3560.07 3460.71,3444.78 3550.09,3355.39
NetC4_1: C4.1 U2.48 | length 170.1
  Top Layer w10: U2.48@3221.37,3336.61 3259.46,3336.61 3288.89,3366.04 3288.89,3376.26 3308.77,3396.14 3309.6,3396.14 3324.88,3411.42 3324.88,3415.43 3334.64,3425.2 C4.1@3346.46,3425.2
NetC5_1: C5.1 U2.43 | length 129.2
  Top Layer w10: U2.43@3221.37,3238.19 3324.8,3238.19 3334.64,3248.03 C5.1@3346.46,3248.03
NetC6_1: C6.1 U2.38 | length 264.6
  Top Layer w10: U2.38@3221.37,3139.76 3295.56,3139.76 3315.41,3159.61 3379.79,3159.61 3389.79,3149.61 3425.2,3149.61 C6.1@3425.2,3101.22
NetC7_1: C7.1 R2.1 U2.33 | length 1392
  Top Layer w10: v3(3066.92,3732.28) 3062.13,3732.28 3051.82,3742.59 3009.56,3742.59 2989.68,3722.71 2989.68,3691.42 3007.87,3673.23 3007.87,3644.5 3026.09,3626.29 3112.27,3626.29 3126.29,3612.27 3126.29,3488.18 3145.66,3468.81 v3(3145.66,3401.57) ; v3(3118.1,3047.24) 3118.42,3047.55 3155.58,3047.55 3161.79,3041.34 3339.43,3041.34 3448.07,2932.7 3448.07,2929.88 3472.44,2905.51 C7.1@3503.94,2905.51
  Bottom Layer w10: R2.1@3062.99,3759.84 3062.99,3736.21 v3(3066.92,3732.28) ; v3(3118.1,3047.24) 3118.1,3070.86 3163.23,3115.98 3163.23,3124.16 ; v3(3145.66,3401.57) 3165.35,3381.88 3165.35,3325.19 3153.22,3313.06 3153.22,3293.23 3163.22,3283.23 3163.22,3124.17
NetC7_2: C7.2 R3.1 U2.32 | length 1228.4
  Top Layer w10: v3(3035.45,3650.78) 3044.5,3641.73 3129.87,3641.73 3141.73,3629.87 3141.73,3511.81 3173.23,3480.32 3173.23,3307.07 v3(3177.16,3303.14) ; v3(3145.66,3023.62) 3148.62,3020.65 U2.32@3218.45,3020.65 ; U2.32@3221.37,3021.65 3339.41,3021.65 3434.13,2926.93 3434.13,2912.32 C7.2@3503.94,2842.52
  Bottom Layer w10: v3(3035.45,3650.78) 3035.45,3649.59 R3.1@3062.99,3622.05 ; v3(3145.66,3023.62) 3145.66,3034.67 3177.17,3066.18 3177.17,3129.93 v3(3177.16,3303.14)
NetC8_1: C8.1 R4.1 U2.31 | length 2000
  Top Layer w10: v3(3137.79,2972.43) 3158.38,2972.43 3185.95,3000 3278.75,3000 3283.32,3004.57 3322.98,3004.57 3351.02,2976.52 3351.02,2960 C8.1@3405.51,2905.51 ; v3(3649.61,3728.35) 3664.58,3728.35 3677.02,3740.79 3869.45,3740.79 3899.13,3711.1 3923.51,3711.1 3948.05,3686.56 v1(3948.05,3639.49)
  Bottom Layer w10: v3(3137.79,2972.43) 3144.16,2966.06 3232.51,2966.06 3257.01,2990.56 3257.01,3048.35 3371.57,3162.91 3473.93,3162.91 3554.74,3243.71 3584.36,3214.09 3612.48,3214.09 3632.36,3233.97 3632.36,3262.08 3626.34,3268.1 3651.71,3293.46 3761.99,3293.46 3931.26,3462.73 v1@3931.26,3635.98 ; v3(3649.61,3728.35) 3649.61,3755.9 R4.1@3653.54,3759.84